# Altium PCB Booster_PA_PREAMP.PcbDoc (part 2 of 2)
Units mil, origin at the board's own origin, x right, y up, seen from the top; angles counter-clockwise.
Board outline 3139.79 x 1141.76 mil, 2 copper layers (Top Layer, Bottom Layer), stack 42.17 mil thick; 86 components, 52 nets, 234 pads, 243 vias.
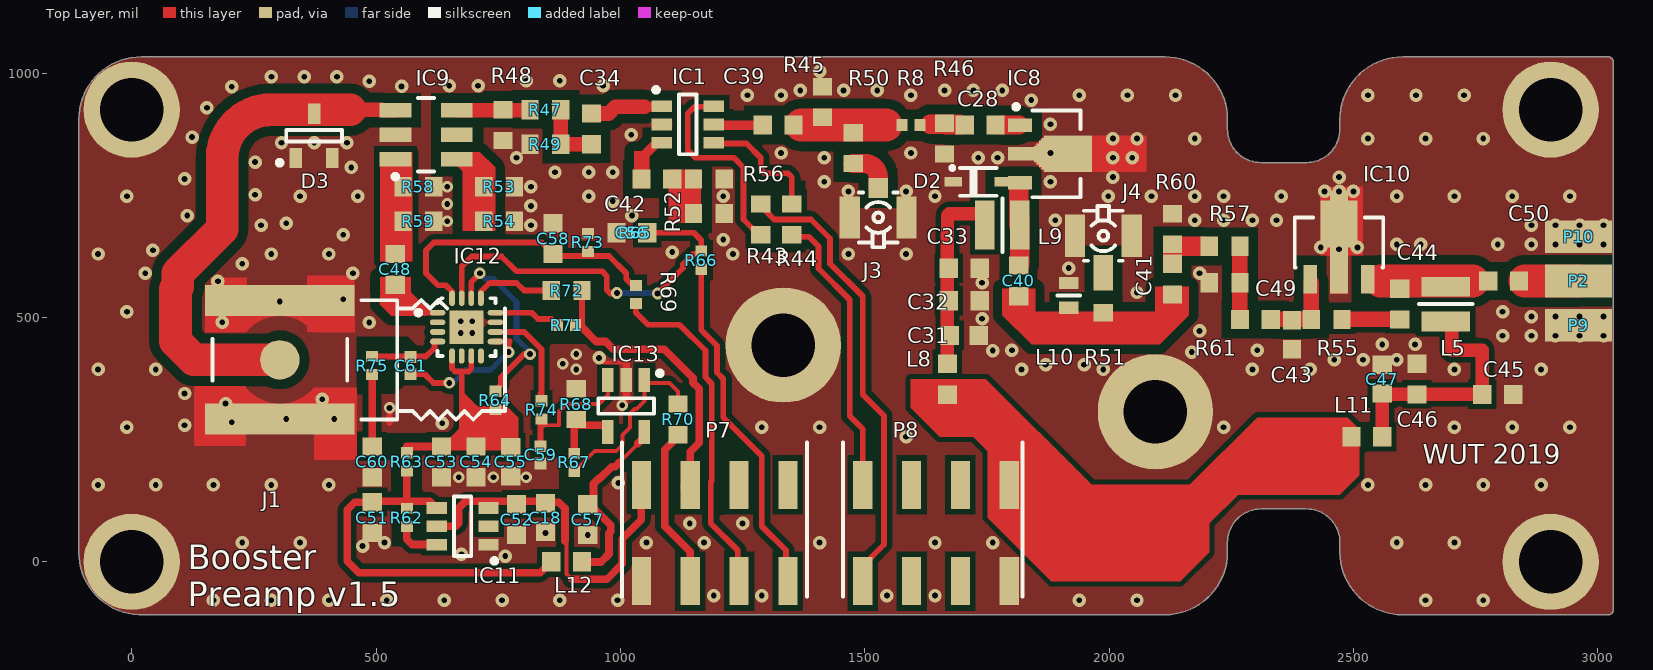
[diagram p0: Top Layer view]

## Via types
v1: diameter 27.56, hole 11.81, Top Layer to Bottom Layer, tented both sides, 222 vias
v2: diameter 23.62, hole 11.81, Top Layer to Bottom Layer, tented both sides, 21 vias

## Nets (pads, with @x,y where several pads share a name; then routed paths per layer and width w, separated by ;. In a path a pad name is that pad's centre, name@x,y a point inside that pad or via, vN(x,y) a via of type N, cw(c..) or ccw(c..) an arc to the next point about the centre after c; other vN are vias at no path point) (continued)
VCC_PREAMP_1: (continued)
  Top Layer w15: 900.64,-35.43 972.44,-35.43 1003.92,-3.96 1003.92,47.22 1042.91,86.22 P7.8
  Top Layer w15.75: IC11.5@625.98,72.75 663.26,72.75 669.29,78.78 669.29,110.24 683.07,124.02 844.49,124.02 846.46,122.05 874.02,122.05 886.51,109.55 886.51,42.57
pads on no net: IC9.5 IC11.2 IC12.2 IC12.3 IC12.6 IC12.8 P7.2 P7.4 P8.3 P8.4 P8.5 P8.6

## Polygon pours and split planes (outlines as drawn)
GND on Bottom Layer "BOTTOM_GND_POLY" (solid, remove dead copper, pour order 5): 14.24,-108.17 ccw(c15.75,-98.43) 15.75,-108.28 2114.17,-108.28 ccw(c2114.17,19.68) 2242.14,19.68 2242.14,39.37 ccw(c2232.29,39.37) 2242.14,39.41 cw(c2311.02,39.37) 2311.02,108.25 2403.54,108.25 cw(c2403.54,39.37) 2472.43,39.37 2472.43,19.68 cw(c2482.28,19.68) 2472.43,19.73 2472.43,19.68 ccw(c2600.39,19.68) 2600.39,-108.28 2903.54,-108.28 ccw(c2903.54,-98.43) 2903.59,-108.28 3021.65,-108.28 ccw(c3021.65,-98.43) 3031.51,-98.43 3031.51,1023.62 ccw(c3021.65,1023.62) 3021.65,1033.48 2600.39,1033.48 ccw(c2600.39,905.51) 2472.43,905.51 ccw(c2482.28,905.51) 2472.43,905.47 2472.43,885.83 cw(c2403.54,885.83) 2403.54,816.94 2311.02,816.94 cw(c2311.02,885.83) 2242.14,885.79 ccw(c2232.29,885.83) 2242.14,885.83 2242.14,905.51 ccw(c2114.17,905.51) 2114.17,1033.48 19.68,1033.48 ccw(c19.68,905.51) -108.28,905.51 -108.28,19.68 ccw(c19.69,19.68)
GND on Top Layer "TOP_GND_POLY" (solid, remove dead copper, pour order 1): 14.24,-108.17 ccw(c15.75,-98.43) 15.75,-108.28 2114.17,-108.28 ccw(c2114.17,19.68) 2242.14,19.68 2242.14,39.37 ccw(c2232.29,39.37) 2242.14,39.41 cw(c2311.02,39.37) 2311.02,108.25 2403.54,108.25 cw(c2403.54,39.37) 2472.43,39.37 2472.43,19.68 cw(c2482.28,19.68) 2472.43,19.73 2472.43,19.68 ccw(c2600.39,19.68) 2600.39,-108.28 2903.54,-108.28 ccw(c2903.54,-98.43) 2903.59,-108.28 3021.65,-108.28 ccw(c3021.65,-98.43) 3031.51,-98.43 3031.51,1023.62 ccw(c3021.65,1023.62) 3021.65,1033.48 2600.39,1033.48 ccw(c2600.39,905.51) 2472.43,905.51 ccw(c2482.28,905.51) 2472.43,905.47 2472.43,885.83 cw(c2403.54,885.83) 2403.54,816.94 2311.02,816.94 cw(c2311.02,885.83) 2242.14,885.79 ccw(c2232.29,885.83) 2242.14,885.83 2242.14,905.51 ccw(c2114.17,905.51) 2114.17,1033.48 19.68,1033.48 ccw(c19.68,905.51) -108.28,905.51 -108.28,19.68 ccw(c19.69,19.68)

## Other copper
Top Layer:
  rectangle net GND: 358.57,470.08 455.91,585.83
  rectangle net GND: 161.73,472.57 235.74,581.98
  rectangle net GND: 372.74,208.66 460.63,356.69
  rectangle net GND: 127.59,236.61 233.55,359.78
  rectangle net GND: 1867.13,797.24 2076.81,872.04
  rectangle net GND: 2431.1,627.36 2519.68,767.72
  rectangle net NetC40_2: 2094.49,511.81 2163.39,562.99
  rectangle net NetC42_1: 1098.43,692.91 1165.35,803.15
  rectangle net NetC42_2: 1027.56,763.78 1059.06,840.55
  rectangle net NetC48_1: 507.87,551.18 570.87,582.68
  rectangle net NetC48_2: 507.87,614.17 574.8,838.58
  pour cut-out: 834.65,322.83 940.94,322.83 978.35,285.43 905.51,212.6 817.69,212.6
  pour cut-out: 834.65,444.88 935.04,444.88 945.87,455.71 925.2,476.38 870.08,476.38
  region net P3V3ADL: 675.2,350.39 706.69,318.9 767.72,318.9 791.34,295.28 791.34,232.28 637.8,232.28 633.86,236.22 675.2,277.56
  pour cut-out: 1211.42,96.46 1173.23,96.46 1141.73,127.95 1200.79,187.01 1230.32,187.01
  pour cut-out: 531.5,31.5 531.5,149.61 533.46,147.64 596.46,147.64 596.46,29.14
  pour cut-out: 874.02,145.67 874.02,232.28 905.51,263.78 937.01,232.28 937.01,145.67
  pour cut-out: 460.63,263.78 633.63,263.78 594.49,224.64 594.49,145.67 531.5,145.67 531.5,208.66 460.63,208.66
  pour cut-out: 460.63,460.63 460.63,342.52 539.37,342.52 594.49,397.64 594.49,431.15 565.01,460.63
  pour cut-out: 1015.35,100.39 1169.29,100.39 1082.68,187.01
  pour cut-out: 612.8,789.37 612.8,958.66 718.5,958.66 720.47,960.63 720.47,789.37
  region net NetC40_2: 1848.43,511.81 2094.49,511.81 2094.49,562.99 2163.39,562.99 2163.39,505.12 2103.15,444.88 1848.43,444.88 1841.73,444.88 1781.5,505.12 1781.5,511.81 1781.5,559.06 1848.43,559.06
  region net VCC_PREAMP: 1594.49,374.02 1748.03,374.02 1964.57,157.48 2165.37,157.48 2303.17,295.28 2488.19,295.28 2511.81,271.65 2511.81,177.17 2472.44,137.8 2263.78,137.8 2204.72,78.74 2204.72,19.68 2145.67,-39.37 1881.89,-39.37 1751.97,90.55 1751.97,226.38 1722.44,255.91 1653.54,255.91 1594.49,314.96
  region net NetIC9_6: 633.86,814.96 661.42,814.96 677.17,799.21 677.17,677.17 744.09,677.17 744.09,807.09 712.6,838.58 681.1,838.58
  region net NetC48_1: 606.3,515.75 570.87,551.18 570.87,582.68 511.81,582.07 507.87,527.56 531.5,503.94 602.36,503.94
  pour cut-out: 2391.73,531.5 2411.42,511.81 2559.06,511.81 2559.06,521.65 2549.21,531.5
  pour cut-out: 1106.3,940.94 1106.3,862.2 1110.24,858.27 1125.98,874.02 1125.98,937.01 1114.17,948.82
  pour cut-out: 1259.84,633.86 1377.95,633.86 1377.95,779.53 1259.84,779.53

## Silkscreen, mask and mechanical layers (free items; w line width, h text height)
Top Overlay:
  text "WUT 2019" at 2641.73,200.79 h39.37
  text "Booster  / Preamp v1.5" at 114.17,-90.55 h50
Bottom Overlay:
  rectangle: 948.82,492.13 1129.92,629.92
  rectangle: 413.39,326.77 874.02,645.67
Top Solder:
  lines w70.87: 86.61,448.82 86.61,582.68 185.04,681.1 185.04,807.09
Bottom Solder:
  rectangle: 830.71,489.74 956.33,637.8
  rectangle: 866.14,332.53 1141.73,503.94
  rectangle: -118.11,-78.74 433.07,1062.99
  rectangle: -118.11,625.98 1181.1,1062.99
  rectangle: 1122.05,-118.11 3031.5,1062.99
  rectangle: -118.11,-118.11 3031.5,338.58
Mechanical 1:
  drawing of 215 lines, arcs and shapes, not listed
  text "Layer" at -670.06,2078.98 h60
  text "Name" at -260.15,2078.98 h60
  text "Material" at 669.59,2078.98 h60
  text "Thickness" at 1529.36,2078.98 h60
  text "Constant" at 2179.2,2078.98 h60
  text "Board Layer Stack" at 2749.06,2078.98 h60
  text "Top Overlay" at -260.15,1958.98 h60
  text "Top Solder" at -260.15,1838.98 h60
  text "Solder Resist" at 669.59,1838.98 h60
  text "0.010mm" at 1529.36,1838.98 h60
  text "3.5" at 2179.2,1838.98 h60
  text "1" at -670.06,1718.98 h60
  text "Top Layer" at -260.15,1718.98 h60
  text "Copper" at 669.59,1718.98 h60
  text "0.036mm" at 1529.36,1718.98 h60
  text "Dielectric 1" at -260.15,1598.98 h60
  text "FR408" at 669.59,1598.98 h60
  text "1.000mm" at 1529.36,1598.98 h60
  text "3.67" at 2179.2,1598.98 h60
  text "2" at -670.06,1478.98 h60
  text "Bottom Layer" at -260.15,1478.98 h60
  text "Copper" at 669.59,1478.98 h60
  text "0.036mm" at 1529.36,1478.98 h60
  text "Bottom Solder" at -260.15,1358.98 h60
  text "Solder Resist" at 669.59,1358.98 h60
  text "0.010mm" at 1529.36,1358.98 h60
  text "3.5" at 2179.2,1358.98 h60
  text "Bottom Overlay" at -260.15,1238.98 h60